# Altium PCB Fuente.PcbDoc
Units mm, origin at the board's own origin, x right, y up, seen from the top; angles counter-clockwise.
Board outline 160 x 117.5 mm, 2 copper layers (Bottom Layer, Top Layer); 33 components, 19 nets, 81 pads, 0 vias.
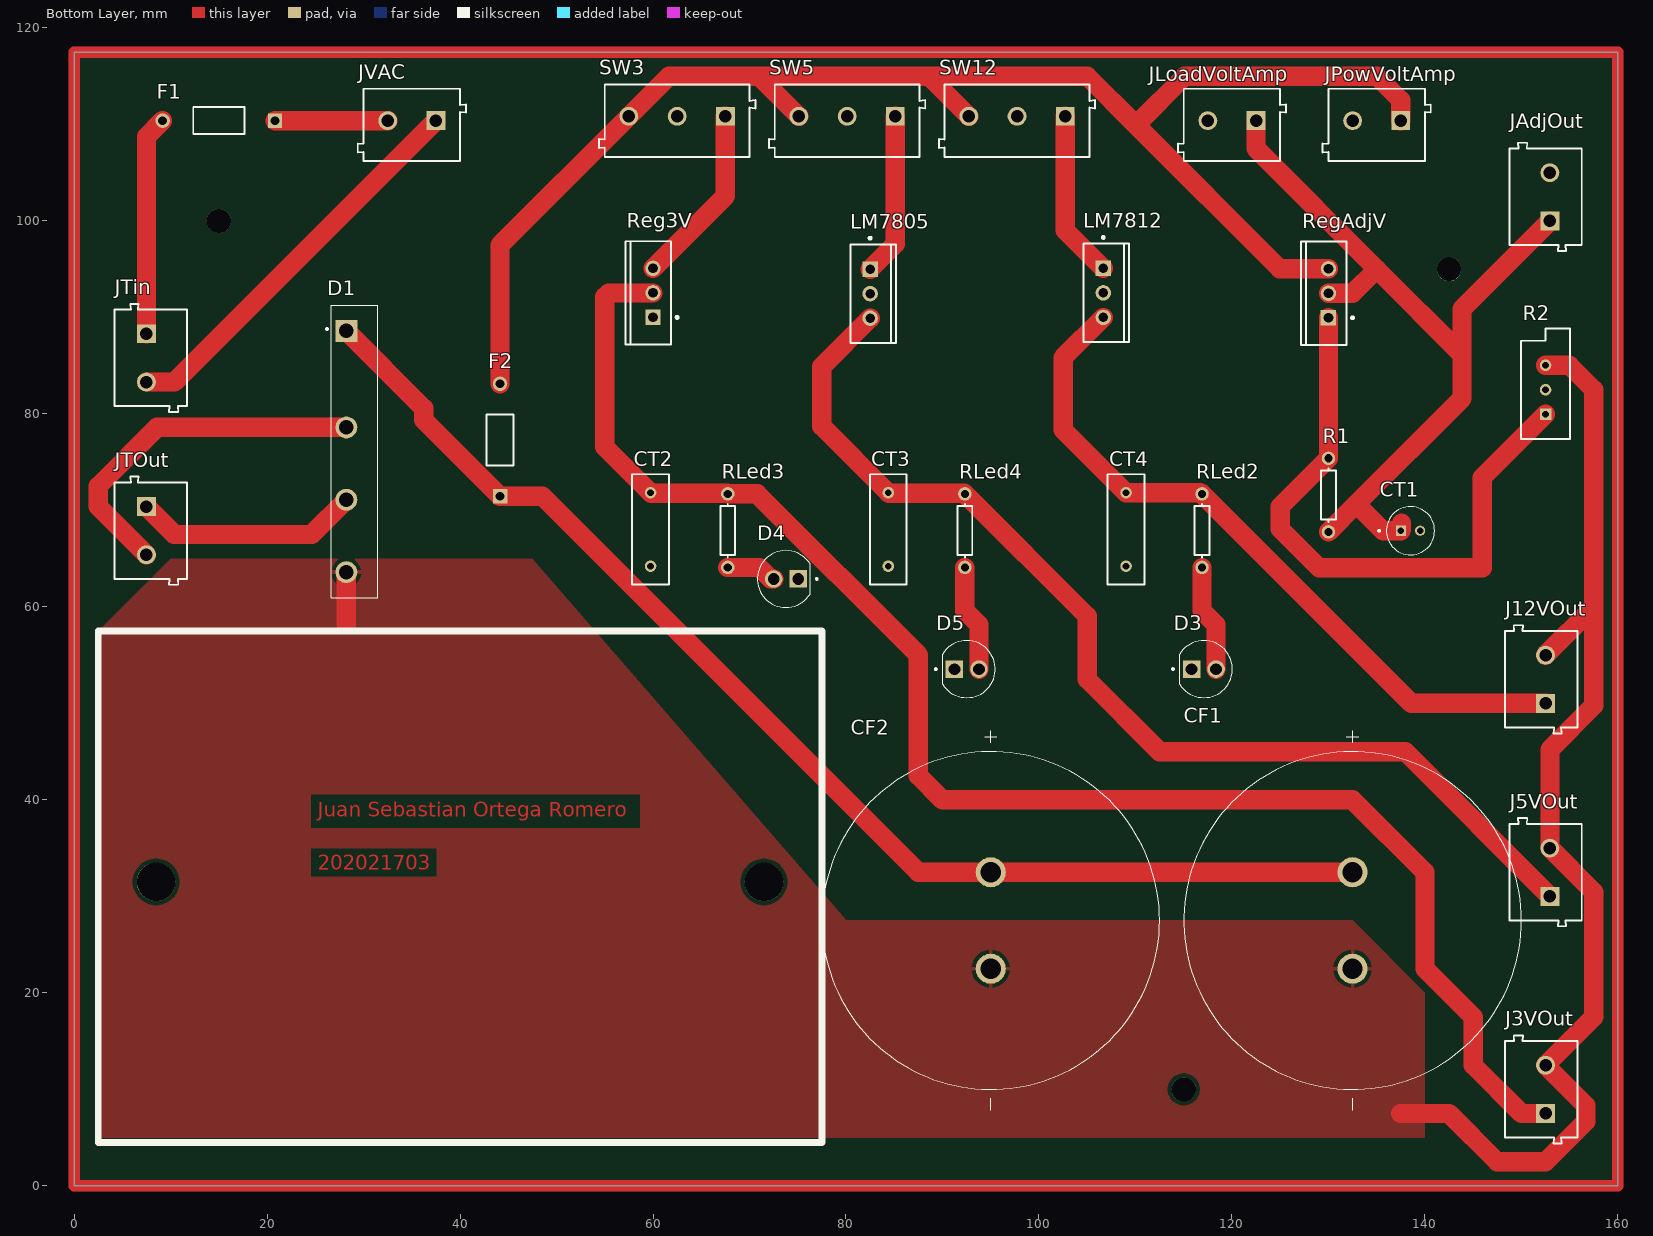
[diagram p0: Bottom Layer view]
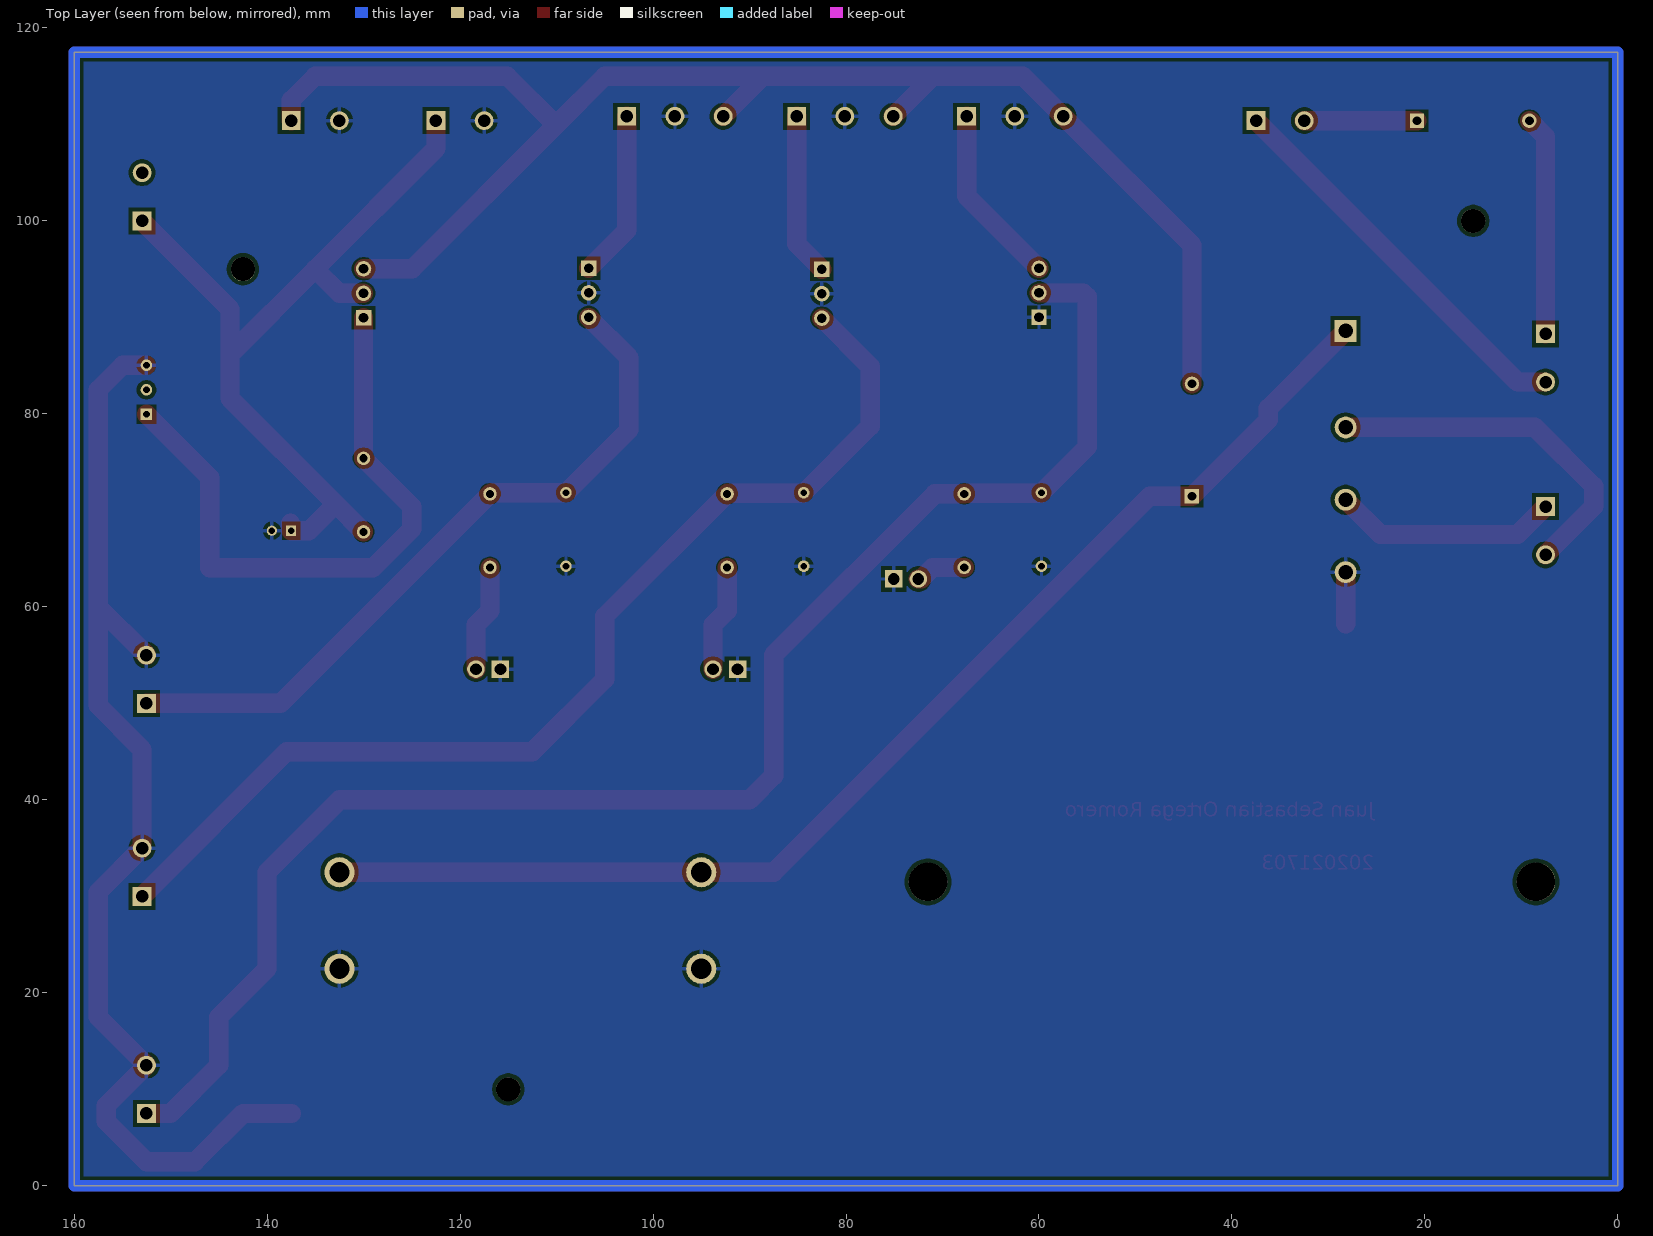
[diagram p1: Top Layer view, seen from below]

## Layer stack, top to bottom
Bottom Solder: solder mask 0.0102, Solder Resist, Dk 3.5
Bottom Layer: signal copper 0.0356
Dielectric 1: dielectric 0.32, FR-4, Dk 4.8
Top Layer: signal copper 0.0356
Top Solder: solder mask 0.0102, Solder Resist, Dk 3.5

## Board outline
0,0 160,0 160,117.5 0,117.5

## Design rules (kind name [scope] priority, off if disabled: settings)
Clearance [All] p1: gap=0.4 ignorepadtopadclearanceinfootprint=FALSE
Height [All] p1: minheight=0 maxheight=60 prefheight=12.7
PlaneClearance [All] p1: clearance=1
PlaneConnect [All] p1: planeconnectstyle=Relief reliefexpansion=0.6 reliefentries=4 reliefconductorwidth=0.4 reliefairgap=0.4
PolygonConnect [All] p1: connectstyle=Relief reliefconductorwidth=0.4 reliefentries=4 polygonreliefangle="90 Angle" airgapwidth=0.4
RoutingVias [All] p1: holewidth=0.711 width=1.27 viastyle="Through Hole" minholewidth=0.711 minwidth=1.27 maxholewidth=0.711 maxwidth=1.27
SolderMaskExpansion [All] p1: expansion=0.102 istentingtop=FALSE
Width [All] p1: maxlimit=2 minlimit=0.254 preferedwidth=0.7 toplayer_minwidth=0.293 bottomlayer_maxwidth=0.254 bottomlayer_prefwidth=0.254 minimp=50.000000 maximp=50.000000 favimp=50.000000
27 further rules are at their usual default settings.

## Components (designator, comment, footprint, x,y, rotation, side; value= is the part's Value field where it differs from the comment)
CF1 "Cap" 4700uF 132.5,27.5 r270 top value=4700uF
CF2 "Cap" 4700uF 95,27.5 r270 top value=4700uF
CT1 "Cap Pol1" CAPPRD200W50D500H1250 138.5,67.895 r0 top value=1uF
CT2 "CapTant" RAD-0.3 59.746,68.029 r90 top value=10uF
CT3 "CapTant" RAD-0.3 84.384,68.029 r90 top value=10uF
CT4 "CapTant" RAD-0.3 109.022,68.029 r90 top value=10uF
D1 "Bridge1" DIOB_GBJ2510 29.071,76.103 r270 top
D3 "LEDGreen" LEDRD254W57D500H1070 117.084,53.551 r0 top
D4 "LEDGreen" LEDRD254W57D500H1070 73.77,62.895 r180 top
D5 "LEDGreen" LEDRD254W57D500H1070 92.509,53.551 r0 top
F1 "Fuse 1" PIN-W2/E2.8 15,110.395 r180 top
F2 "Fuse 1" PIN-W2/E2.8 44.145,77.293 r90 top
J3VOut "691102710002" 691102710002 152.05,10 r90 top
J5VOut "691102710002" 691102710002 152.5,32.5 r90 top
J12VOut "691102710002" 691102710002 152.05,52.5 r90 top
JAdjOut "691102710002" 691102710002 152.5,102.5 r90 top
JLoadVoltAmp "691102710002" 691102710002 120,109.945 r180 top
JPowVoltAmp "691102710002" 691102710002 135,109.945 r180 top
JTin "691102710002" 691102710002 7.95,85.802 r270 top
JTOut "691102710002" 691102710002 7.95,67.895 r270 top
JVAC "691102710002" 691102710002 35,109.945 r180 top
LM7805 "LM7805CT" FAIR-TO-220-3 82.5,92.46 r0 top
LM7812 "LM7805CT" FAIR-TO-220-3 106.667,92.54 r0 top
R1 "Res1" AXIAL-0.3 130,71.585 r270 top value=270
R2 "RPot" VR5 152.5,82.5 r90 top value=5K
Reg3V "LM1084IT33" NDE0003A 60,92.54 r90 top
RegAdjV "LM338T/NOPB" NDE0003A 130,92.5 r90 top
RLed2 "Res1" AXIAL-0.3 116.896,67.902 r90 top value=470
RLed3 "Res1" AXIAL-0.3 67.747,67.902 r90 top value=47
RLed4 "Res1" AXIAL-0.3 92.322,67.902 r90 top value=150
SW3 "691102710003" 691102710003 62.5,110.395 r180 top
SW5 "691102710003" 691102710003 80.113,110.395 r180 top
SW12 "691102710003" 691102710003 97.726,110.395 r180 top

## Footprints (in the part's own frame and the unit in brackets; to place one, negate y for a bottom-side part, rotate by r counter-clockwise, add the part's x,y. Pads: shape width x height; smd on the part's side, far side on the other; paste and mask are expansions set on the pad)
4700uF [mm]
  round 3.116 hole 2.1: NEG(5,0) POS(-5,0)
  silkscreen extent -19.69,-17.5 19.68,17.5, body extent -17.49,-17.5 17.5,17.5, height 57
691102710002 [mm] "5,00mm - modular - blue - Horizontal entry with pressure clamp - 9,9 mm height - 02p"
  rect 1.95x1.95 hole 1.3: 1(-2.5,-0.45)
  round 1.95 hole 1.3: 2(2.5,-0.45)
  silkscreen extent -5.6,-3.75 5.6,3.75, body extent -5.6,-3.75 5.6,3.75, height 9.96
691102710003 [mm] "5,00mm - modular - blue - Horizontal entry with pressure clamp - 9,9 mm height - 03p"
  rect 1.95x1.95 hole 1.3: 1(-5,-0.45)
  round 1.95 hole 1.3: 2(0,-0.45) 3(5,-0.45)
  silkscreen extent -8.1,-3.75 8.1,3.75, body extent -8.1,-3.75 8.1,3.75, height 9.96
AXIAL-0.3 [mm] "Axial Device, Thru-Hole; 2 Leads; 0.3 in Pin Spacing"
  round 1.4 hole 0.85: 1(-3.81,0) 2(3.81,0)
  silkscreen extent -2.77,-0.76 2.77,0.76
CAPPRD200W50D500H1250 [mm]
  round 1.05 hole 0.7: N(1,0)
  rect 1.05x1.05 hole 0.7: P(-1,0)
  silkscreen extent -3.35,-2.5 2.5,2.5, body extent -2.5,-2.5 2.5,2.5, height 12
DIOB_GBJ2510 [mm]
  rect 2.27x2.27 hole 1.51: 1(-12.5,-0.85)
  round 2.27 hole 1.51: 2(-2.5,-0.85) 3(5,-0.85) 4(12.5,-0.85)
  silkscreen extent -15.15,-2.95 15.15,2.4
FAIR-TO-220-3 [mm] "FM, 3-Leads, Body 10.2x4.7mm, Pitch 2.54mm"
  rect 1.6x1.6 hole 1: 1(0,2.54)
  round 1.6 hole 1: 2(0,0) 3(0,-2.54)
  silkscreen extent -2.04,-5.1 2.66,5.87, body extent -2.04,-5.1 2.66,5.1, height 18.95
LEDRD254W57D500H1070 [mm]
  round 1.815 hole 1.21: A(1.27,0)
  rect 1.815x1.815 hole 1.21: C(-1.27,0)
  silkscreen extent -3.3,-2.96 2.96,2.96
NDE0003A [mm] "FM, 3-Leads, Body 10.7x4.7mm, Pitch 2.54mm"
  rect 1.6x1.6 hole 1: 1(-2.54,0)
  round 1.6 hole 1: 2(0,0) 3(2.54,0)
  silkscreen extent -5.35,-2.63 5.35,2.85, body extent -5.4,-1.9 5.4,2.9, height 19.4
PIN-W2/E2.8 [mm] "Thru-Hole; 2 Leads"
  rect 1.5x1.5 hole 0.9: 1(-5.825,0)
  round 1.5 hole 0.9: 2(5.825,0)
  silkscreen extent -2.65,-1.4 2.65,1.4
RAD-0.3 [mm] "Radial Cap, Thru-Hole; 2 Leads; 0.3 in Pin Spacing"
  round 1.2 hole 0.7: 1(-3.81,0) 2(3.81,0)
  silkscreen extent -5.71,-1.9 5.72,1.91
VR5 [mm] "Thru-Hole; 3 Leads"
  rect 1.2x1.2 hole 0.7: 1(-2.54,0)
  round 1.2 hole 0.7: 2(0,0) 3(2.54,0)
  silkscreen extent -5.08,-2.54 6.35,2.54

## Part data
CF1 CF2: "Capacitor", LatestRevisionDate=17-Jul-2002, LatestRevisionNote="Re-released for DXP Platform.", PackageDescription="Radial Cap, Thru-Hole; 2 Leads; 0.3 in Pin Spacing", PackageReference=RAD-0.3, Published=8-Jun-2000, Publisher="Altium Limited"
CT1: "Polarized Capacitor (Radial)", LatestRevisionDate=17-Jul-2002, LatestRevisionNote="Re-released for DXP Platform.", PackageDescription="Polarized Capacitor (Radial); 2 Leads", PackageReference=RB7.6-15, Published=8-Jun-2000, Publisher="Altium Limited"
CT2 CT3 CT4: library part Cap, "Capacitor", LatestRevisionDate=17-Jul-2002, LatestRevisionNote="Re-released for DXP Platform.", PackageDescription="Radial Cap, Thru-Hole; 2 Leads; 0.3 in Pin Spacing", PackageReference=RAD-0.3, Published=8-Jun-2000, Publisher="Altium Limited"
D1: "Full Wave Diode Bridge", DatasheetVersion=E2732B, LatestRevisionDate=29-May-2009, LatestRevisionNote="Sch pins A & K swapped.", PackageDescription="Bridge Rectifier; 4 Terminals; Body 9.4 x 9.4 mm (typ); Pitch 5.08 mm", PackageReference=D-38, Published=8-Jun-2000, Publisher="Altium Limited"
D3 D4 D5: library part LED2, "Typical RED, GREEN, YELLOW, AMBER GaAs LED", LatestRevisionDate=17-Jul-2002, LatestRevisionNote="Re-released for DXP Platform.", PackageDescription="SM LED; 2 Flat Leads", PackageReference=3.2X1.6X1.1, PackageVersion=Feb-2002, Published=8-Jun-2000, Publisher="Altium Limited"
F1: "Fuse", CURRENT=0.5, LatestRevisionDate=17-Jul-2002, LatestRevisionNote="Re-released for DXP Platform.", PackageDescription="Thru-Hole; 2 Leads", PackageReference=PIN-W2/E2.8, Published=8-Jun-2000, Publisher="Altium Limited"
F2: "Fuse", CURRENT=3.15, LatestRevisionDate=17-Jul-2002, LatestRevisionNote="Re-released for DXP Platform.", PackageDescription="Thru-Hole; 2 Leads", PackageReference=PIN-W2/E2.8, Published=8-Jun-2000, Publisher="Altium Limited"
J3VOut J5VOut J12VOut JAdjOut JLoadVoltAmp JPowVoltAmp JTin JTOut JVAC: library part CMP-1502-03258-1, "Series 102 - 5.00 mm Horizontal Entry Modular with Pressure Clamp WR-TBL, 2 pin", Manufacturer="Wurth Elektronik", Operating Temperature=-40to105degC, Datasheet URL=http://katalog.we-online.de/em/datasheet/6911027100xx.pdf, Manufacturer URL=http://www.we-online.de, Mounting Technology=THT, Package Reference=691102710002, Packaging=Box, Part Number=691102710002, Pin Number=2, Pitch=5.00mm, Publisher=WurthElektronik
LM7805 LM7812: library part CMP-2000-04938-1, "Positive Voltage Regulator, 5 V, 1 A, -40 to 125 degC, 3-Pin TO-220, RoHS, Tube", Manufacturer=FairchildSemiconductor, Maximum Input Voltage=35V, Maximum Output Current=2.2(Typ)A, Maximum Quiescent Current=8mA, Operating Temperature=-40to125degC, Output Voltage=5V, Package=3TO-220AB, Package Description="3-Pin Through Hole Device, Body 10 x 4.5 mm, Pitch 2.54 mm", Package Reference=TO-220, Typical Dropout Voltage @ Current=2@1AV, Accuracy=±4%, Category=LinearRegulator, Datasheet URL=https://datasheet.ciiva.com/26904/lm7805ct-26904988.pdf, Datasheet Version=Aug-12, Line Regulation=100mV, Load Regulation=100mV, Manufacturer URL=https://www.fairchildsemi.com/, Mounting=ThroughHole, Number of Outputs=1, Output Type=Fixed, Package URL=https://www.fairchildsemi.com/package-drawings/TO/TO220B03.pdf, Packaging=Rail/Tube, Polarity=Positive, Rad Hard=No, Type=Linear
R1 RLed2 RLed3 RLed4: "Resistor", LatestRevisionDate=17-Jul-2002, LatestRevisionNote="Re-released for DXP Platform.", PackageDescription="Axial Device, Thru-Hole; 2 Leads; 0.3 in Pin Spacing", PackageReference=AXIAL-0.3, Published=8-Jun-2000, Publisher="Altium Limited"
R2: "Potentiometer", LatestRevisionDate=17-Jul-2002, LatestRevisionNote="Re-released for DXP Platform.", PackageDescription="Variable Resistor, Thru-Hole; 3 Leads", PackageReference=VR5, Published=8-Jun-2000, Publisher="Altium Limited", Set Position=0.5, Sim Note="Enter the Resistance value and the set point into parameter fields."
Reg3V: library part CMP-0062-02533-3, "5A Low Dropout Positive Regulators, 3-pin TO-220, Pb-Free", Manufacturer="Texas Instruments", PackageTopMarking=NSUZXYTTE#*LM1084*IT-3.3, PowerWise=N, ComponentLink1Description="Datasheet URL", ComponentLink1URL=http://www.ti.com/general/docs/lit/getliterature.tsp?genericPartNumber=LM1084&fileType=pdf, CompType="LDO IC", PackageDescription="TO-220, Molded, 3 Lead, Straight", PackageReference=NDE0003A, PinCount=3, RoHS=Y
RegAdjV: library part CMP-0062-02474-3, "5 Amp Adjustable Regulator, 3-pin TO-220, Pb-Free", Manufacturer="Texas Instruments", PackageTopMarking="NSUZXYTTE#*LM338T P+", PowerWise=N, ComponentLink1Description="Datasheet URL", ComponentLink1URL=http://www.ti.com/general/docs/lit/getliterature.tsp?genericPartNumber=LM338&fileType=pdf, CompType="LDO IC", PackageDescription="TO-220, Molded, 3 Lead, Straight", PackageReference=NDE0003A, PinCount=3, RoHS=Y
SW3 SW5 SW12: library part CMP-1502-03259-1, "Series 102 - 5.00 mm Horizontal Entry Modular with Pressure Clamp WR-TBL, 3 pin", Manufacturer="Wurth Elektronik", Operating Temperature=-40to105degC, Datasheet URL=http://katalog.we-online.de/em/datasheet/6911027100xx.pdf, Manufacturer URL=http://www.we-online.de, Mounting Technology=THT, Package Reference=691102710003, Packaging=Box, Part Number=691102710003, Pin Number=3, Pitch=5.00mm, Publisher=WurthElektronik

## Free pads (board coordinates)
  oval 2.502x2.46 hole 2.502: 2(15,100) 2(115,10)
  round 2.502 hole 2.502: 2(142.5,95)
  round 3.998 hole 3.998: 3(8.5,31.5) 4(71.5,31.5)

## Nets (pads, with @x,y where several pads share a name; then routed paths per layer and width w, separated by ;. In a path a pad name is that pad's centre, name@x,y a point inside that pad or via, vN(x,y) a via of type N, cw(c..) or ccw(c..) an arc to the next point about the centre after c; other vN are vias at no path point)
GND: CF1.NEG CF2.NEG CT1.N CT2.1 CT3.1 CT4.1 D1.4 D3.C D4.C D5.C J3VOut.2 J5VOut.2 J12VOut.2 JLoadVoltAmp.2 JPowVoltAmp.2 LM7805.2 LM7812.2 R2.3 Reg3V.1 SW3.2 SW5.2 SW12.2 | length 124.9
  Bottom Layer w2: 28.221,58.221 D1.4 ; 137.5,7.5 142.5,7.5 147.5,2.5 152.5,2.5 156.672,6.672 156.672,8.328 J3VOut.2 157.5,17.5 157.5,30.45 J5VOut.2 152.95,45.225 157.5,49.775 157.5,60 ; J12VOut.2 157.5,60 ; R2.3 154.96,85.04 157.5,82.5 157.5,60
NetCF1_2: CF1.POS CF2.POS D1.1 F2.1 | length 128.2
  Bottom Layer w2: D1.1 36.251,80.573 36.251,79.362 F2.1 48.532,71.468 87.5,32.5 CF2.POS CF1.POS
NetD1_2: D1.3 JTOut.1 | length 23.4
  Bottom Layer w2: JTOut.1 10.395,67.5 24.618,67.5 D1.3
NetD3_1: D3.A RLed2.1 | length 11.1
  Bottom Layer w2: RLed2.1 116.896,59.606 118.354,58.149 D3.A
NetD4_1: D4.A RLed3.1 | length 5.2
  Bottom Layer w2: RLed3.1 71.001,64.092 72.198,62.895 D4.A
NetD5_1: D5.A RLed4.1 | length 11.1
  Bottom Layer w2: RLed4.1 92.321,59.606 93.779,58.149 D5.A
NetF1_2: F1.2 JTin.1 | length 22.8
  Bottom Layer w2: JTin.1 7.5,108.72 F1.2
NetJTin_2: JTin.2 JVAC.1 | length 41.2
  Bottom Layer w2: JTin.2 10.407,83.302 JVAC.1
NetLM7805_1: LM7805.1 SW5.1 | length 16.9
  Bottom Layer w2: LM7805.1 85.113,97.613 SW5.1
NetLM7812_1: LM7812.1 SW12.1 | length 17.4
  Bottom Layer w2: SW12.1 102.726,99.021 LM7812.1
NetR1_1: R1.1 R2.1 RegAdjV.1 | length 65.2
  Bottom Layer w2: RegAdjV.1 R1.1 125,70.395 125,68.086 129.033,64.053 145.947,64.053 145.947,73.407 R2.1
NetReg3V_3: Reg3V.3 SW3.1 | length 18.9
  Bottom Layer w2: Reg3V.3 67.5,102.58 SW3.1
V3.3Out: CT2.2 J3VOut.1 Reg3V.2 RLed3.2 | length 162.9
  Bottom Layer w2: Reg3V.2 55.41,92.54 55,92.13 55,76.585 CT2.2 59.809,71.776 67.683,71.776 RLed3.2 70.788,71.712 87.5,55 87.5,42.5 90,40 132.5,40 140,32.5 140,22.5 145,17.5 145,12.5 150,7.5 J3VOut.1
V5vOut: CT3.2 J5VOut.1 LM7805.3 RLed4.2 | length 112.7
  Bottom Layer w2: LM7805.3 77.5,84.92 77.5,78.723 CT3.2 84.447,71.776 92.258,71.776 RLed4.2 105,59.033 105,52.5 112.5,45 137.95,45 J5VOut.1
V12Out: CT4.2 J12VOut.1 LM7812.3 RLed2.2 | length 75.1
  Bottom Layer w2: LM7812.3 102.5,85.833 102.5,78.361 CT4.2 116.661,71.839 116.788,71.712 RLed2.2 138.608,50 J12VOut.1
VAdjOut: CT1.P JAdjOut.1 JLoadVoltAmp.1 R1.2 RegAdjV.2 | length 87.4
  Bottom Layer w2: JLoadVoltAmp.1 122.5,107.5 135,95 ; R1.2 132.888,70.663 ; RegAdjV.2 132.5,92.5 135,95 ; 137.575,68.692 137.575,67.97 CT1.P 135.657,67.895 132.888,70.663 ; JAdjOut.1 143.833,90.882 143.833,86.167 ; 132.888,70.663 143.833,81.607 143.833,86.167 ; 135,95 143.833,86.167
VF: F2.2 JPowVoltAmp.1 RegAdjV.3 SW3.3 SW5.3 SW12.3 | length 160.2
  Bottom Layer w2: F2.2 44.145,97.49 SW3.3 61.655,115 70.958,115 ; SW5.3 70.958,115 ; SW12.3 88.571,115 ; RegAdjV.3 124.96,95.04 110.058,109.942 ; JPowVoltAmp.1 137.5,112.5 135,115 115.116,115 110.058,109.942 ; 70.958,115 88.571,115 ; 88.571,115 105,115 110.058,109.942
Vin: F1.1 JVAC.2 | length 11.7
  Bottom Layer w2: F1.1 JVAC.2
Vt: D1.2 JTOut.2 | length 37.4
  Bottom Layer w2: JTOut.2 2.5,70.395 2.5,72.5 8.603,78.603 D1.2
pads on no net: JAdjOut.2 R2.2

## Polygon pours and split planes (outlines as drawn)
GND on Bottom Layer "GND_L01_P005" (solid, pour order 5): 80,27.5 132.5,27.5 140,20 140,5 2.5,5 2.5,57.5 10,65 47.5,65
GND on Top Layer "GND_plane" (solid, remove dead copper, pour order 1): 160,116.887 160,0.395 0.673,0.395 0.673,117.497

## Other copper
Bottom Layer:
  text "Juan Sebastian Ortega Romero" at 25.254,38.262 h1.52
  text "202021703" at 25.254,32.754 h1.52
Multi-Layer:
  lines w0.254: 2.5,117.5 2.5,117.5 ; 160,117.5 160,117.5
  lines w1.2: 0,0 160,0 160,117.5 0,117.5 0,0

## Silkscreen, mask and mechanical layers (free items; w line width, h text height)
Top Overlay:
  lines w0.7: 2.5,4.5 77.5,4.5 77.5,57.5 2.5,57.5 2.5,4.5